# EAGLE board SparkFun_Clock_Generator_5PV49V60-Panel (EAGLE 9.5.1), part 1 of 6
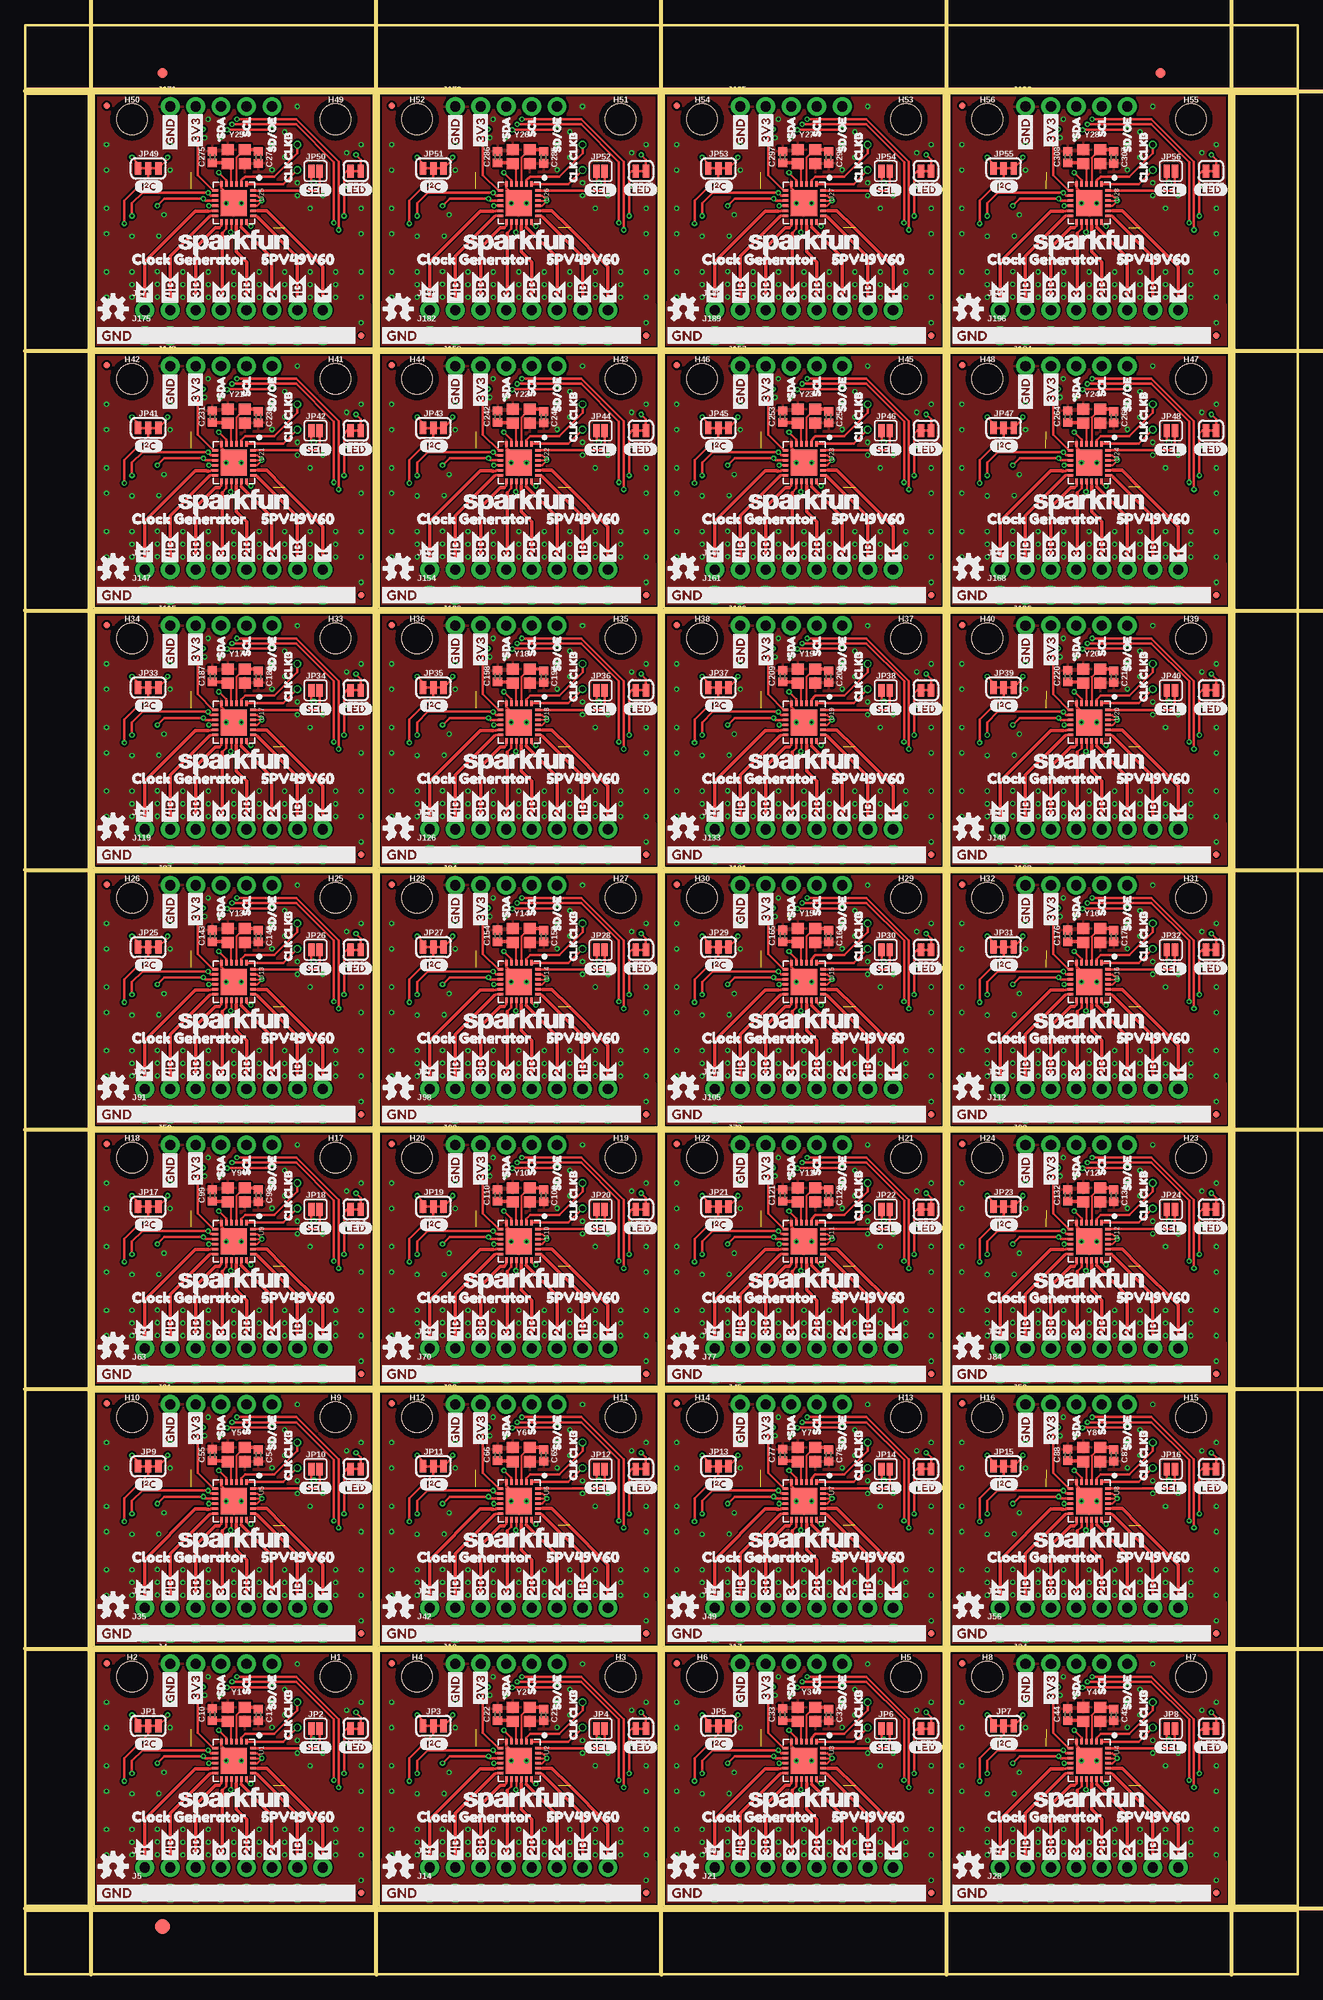
[diagram p0: board, top side]
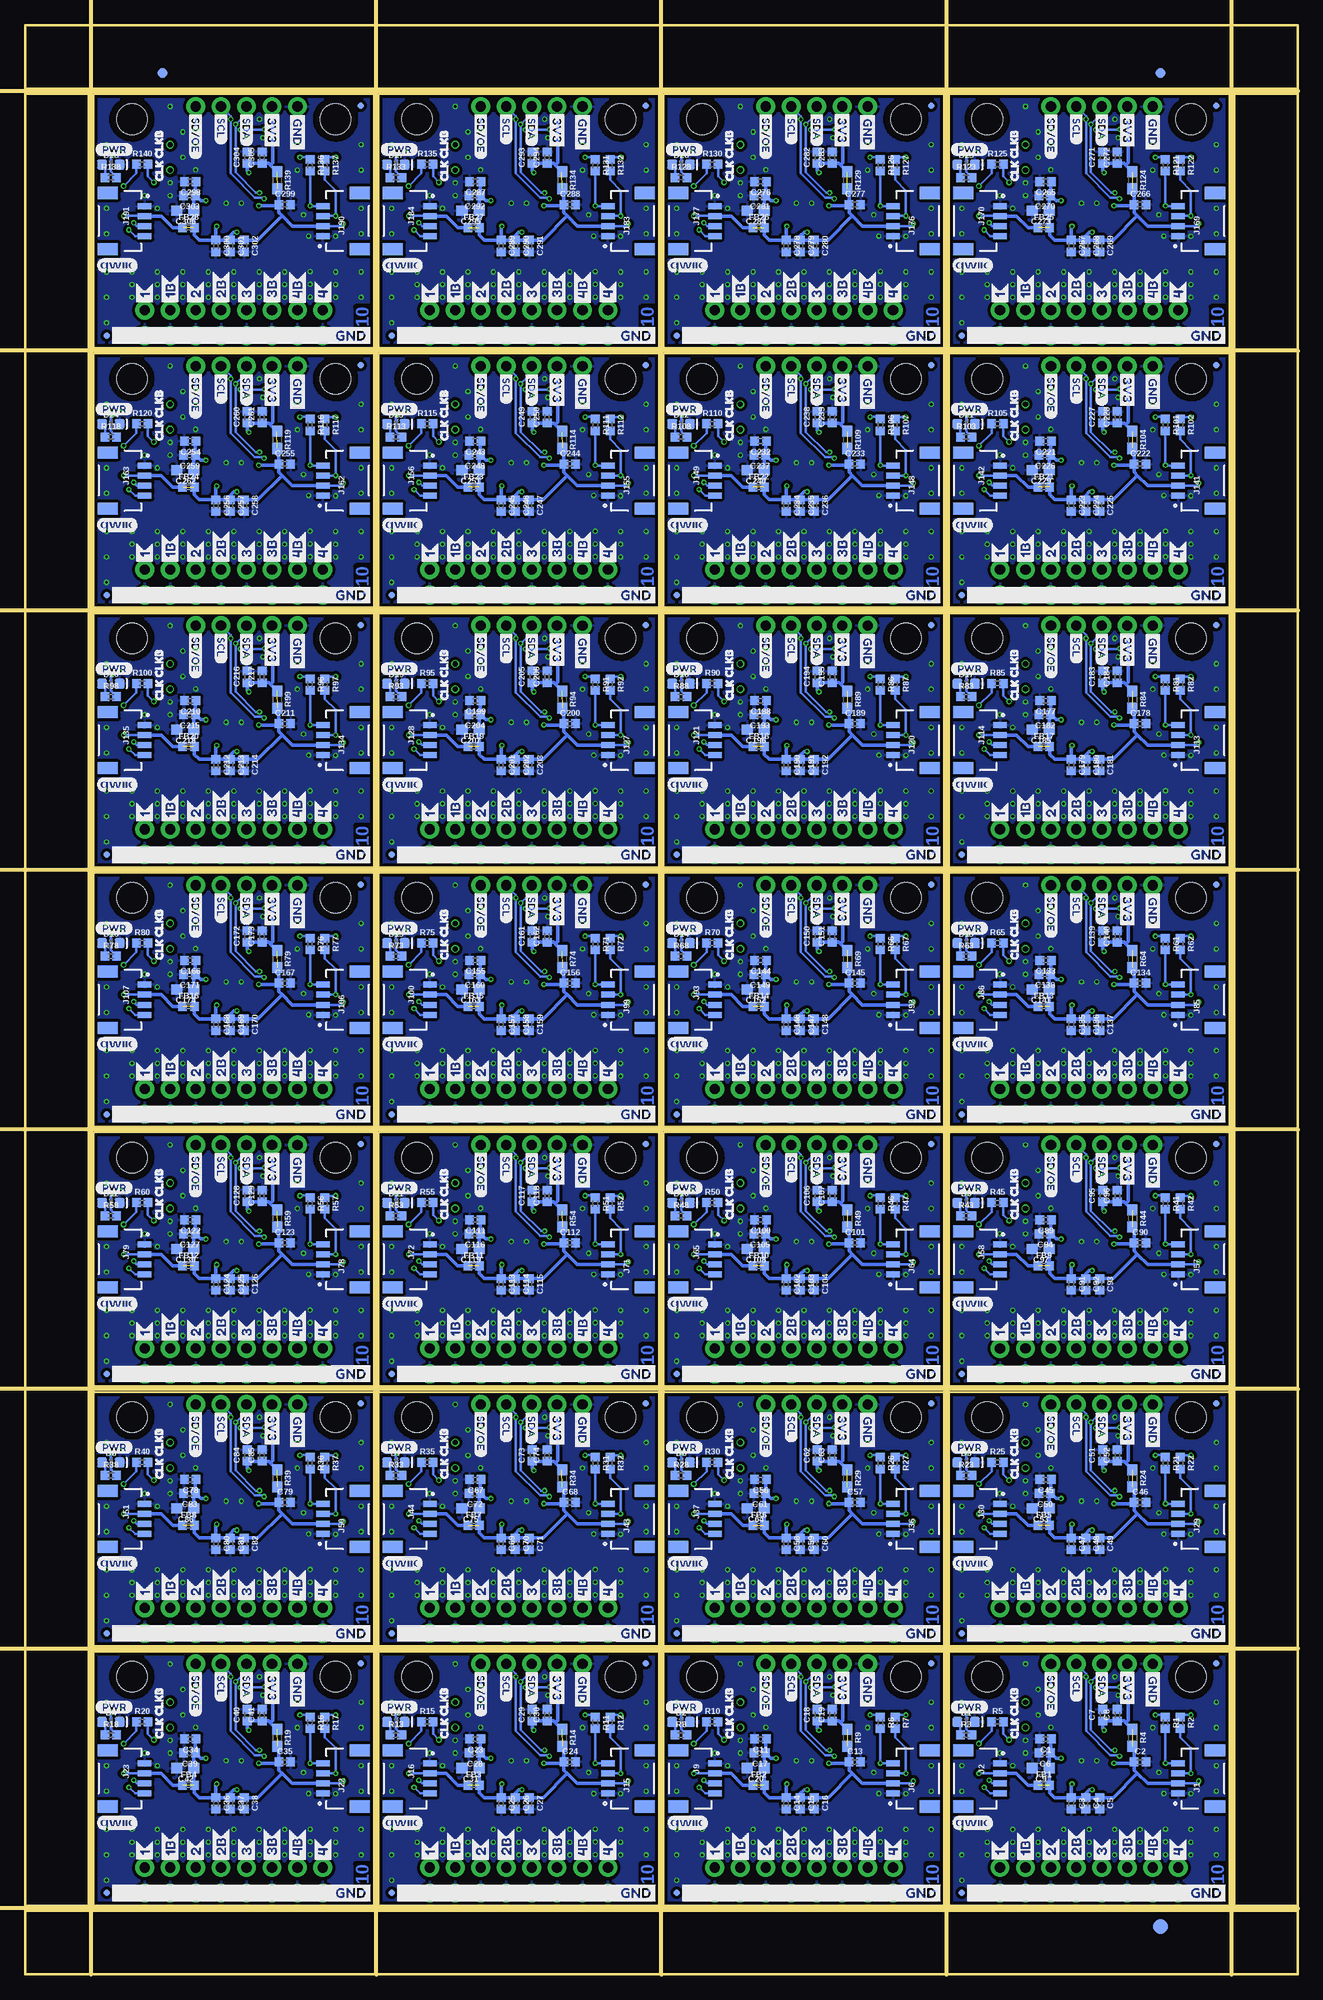
[diagram p1: board, bottom side, seen from below]

Size 127 x 194.56 mm. Coordinates in mm from the lower left corner, seen from the top.
Outline: 128 segments
Copper layers (1*16): Top 0.035mm / dielectric 1.5mm / Bottom 0.035mm
Design rules "SparkFun-2-layer-FAB-LIMIT": minimum track width 4mil, minimum drill 6mil, track to track 4mil, track to pad 4mil, pad to pad 4mil, via to via 4mil, smd to smd 4mil, copper to edge 4mil, drill to drill 4mil, minimum pad ring 5mil, minimum via ring 5mil, stop-mask expansion 4mil, vias tented up to drill 25mil, thermal gap 10mil
Net classes: 1 Clock: clearance 0.127 mm
tRestrict: area 22.2,21.2 to 22.4,22.2; area 20.5,22.7 to 21.4,22.8; area 19.3,21.3 to 19.5,22.2; area 50.7,21.2 to 50.8,22.2; area 48.9,22.7 to 49.9,22.8; area 47.8,21.3 to 47.9,22.2; area 79.1,21.2 to 79.2,22.2; area 77.4,22.7 to 78.3,22.8; area 76.2,21.3 to 76.4,22.2; area 107.6,21.2 to 107.7,22.2; area 105.8,22.7 to 106.8,22.8; area 104.7,21.3 to 104.8,22.2; 72 more areas
Milling: 13 lines

## Footprints (pad centres in the part's own frame; a part is rotated, then mirrored left to right if it is on the bottom)
0402 = smd 0.85 x 0.9: 1 -0.58,0; 2 0.58,0
0603 = smd 1.1 x 1: 1 -0.85,0; 2 0.85,0
LED-0603 = smd 1 x 1: A -0.877,0; C 0.877,0
FIDUCIAL-1X2 = smd 1 x 1: 1 0,0
FIDUCIAL-1.5X3 = smd 1.5 x 1.5: 1 0,0
FIDUCIAL-MICRO = smd 0.635 x 0.635: 1 0,0
STAND-OFF-TIGHT = hole 3.048: 0,0
JST04_1MM_RA = smd 0.6 x 1.35: 1 -1.5,0; 2 -0.5,0; 3 0.5,0; 4 1.5,0 | smd 1.2 x 2: NC1 2.8,-3.675; NC2 -2.8,-3.675
1X08_NO_SILK = drill 1.016 pad 1.88: 1 0,0; 2 2.54,0; 3 5.08,0; 4 7.62,0; 5 10.16,0; 6 12.7,0; 7 15.24,0; 8 17.78,0
1X05_NO_SILK = drill 1.016 pad 1.88: 1 0,0; 2 2.54,0; 3 5.08,0; 4 7.62,0; 5 10.16,0
1X01_SMALL = drill 0.508: P$1 0,0
SMT-JUMPER_3_2-NC_TRACE_SILK = smd 0.635 x 1.27: 1 -1.016,0; 2 0,0; 3 1.016,0
SMT-JUMPER_2_NO_SILK = smd 0.635 x 1.27: 1 -0.406,0; 2 0.406,0
SMT-JUMPER_2_NC_TRACE_SILK = smd 0.635 x 1.27: 1 -0.508,0; 2 0.508,0
VFQFPN-24 = smd 2.6 x 2.6: GND 0,0 | smd 0.55 x 0.25: P1 -1.9,1.25; P2 -1.9,0.75; P3 -1.9,0.25; P4 -1.9,-0.25; P5 -1.9,-0.75; P6 -1.9,-1.25; P13 1.85,-1.25; P14 1.85,-0.75; P15 1.85,-0.25; P16 1.85,0.25; P17 1.85,0.75; P18 1.85,1.25 | smd 0.25 x 0.55: P7 -1.25,-1.85; P8 -0.75,-1.85; P9 -0.25,-1.85; P10 0.25,-1.85; P11 0.75,-1.85; P12 1.25,-1.85; P19 1.25,1.9; P20 0.75,1.9; P21 0.25,1.9; P22 -0.25,1.9; P23 -0.75,1.9; P24 -1.25,1.9
CRYSTAL-SMD-2X2.5MM = smd 1.2 x 1.1: P1 0.846,0.69; P2 -0.854,0.69; P3 -0.854,-0.71; P4 0.846,-0.71

## Placement (x,y rotation side)
C1  0.1uF  [0402]  25.17,23.5 180 bottom
C2  0.1uF  [0402]  15.75,21.21 0 bottom
C3  0.1uF  [0402]  22.61,17.07 270 bottom
C4  0.1uF  [0402]  21.18,17.07 270 bottom
C5  0.1uF  [0402]  19.79,17.07 270 bottom
C6  0.1uF  [0402]  25.25,22.1 180 bottom
C7  0.1uF  [0402]  19.48,25.88 90 bottom
C8  1.0uF  [0402]  18.01,25.88 90 bottom
C9  10uF  [0603]  25.65,20.6 180 bottom
C10  12pF  [0402]  18.69,25.94 90 top
C11  0.1uF  [0402]  53.62,23.5 180 bottom
C12  12pF  [0402]  23.29,25.9 270 top
C13  0.1uF  [0402]  44.2,21.21 0 bottom
C14  0.1uF  [0402]  51.05,17.07 270 bottom
C15  0.1uF  [0402]  49.63,17.07 270 bottom
C16  0.1uF  [0402]  48.23,17.07 270 bottom
C17  0.1uF  [0402]  53.7,22.1 180 bottom
C18  0.1uF  [0402]  47.93,25.88 90 bottom
C19  1.0uF  [0402]  46.46,25.88 90 bottom
C20  10uF  [0603]  54.1,20.6 180 bottom
C21  12pF  [0402]  51.74,25.9 270 top
C22  12pF  [0402]  47.14,25.94 90 top
C23  0.1uF  [0402]  82.07,23.5 180 bottom
C24  0.1uF  [0402]  72.64,21.21 0 bottom
C25  0.1uF  [0402]  79.5,17.07 270 bottom
C26  0.1uF  [0402]  78.08,17.07 270 bottom
C27  0.1uF  [0402]  76.68,17.07 270 bottom
C28  0.1uF  [0402]  82.14,22.1 180 bottom
C29  0.1uF  [0402]  76.38,25.88 90 bottom
C30  1.0uF  [0402]  74.9,25.88 90 bottom
C31  10uF  [0603]  82.55,20.6 180 bottom
C32  12pF  [0402]  80.19,25.9 270 top
C33  12pF  [0402]  75.59,25.94 90 top
C34  0.1uF  [0402]  110.52,23.5 180 bottom
C35  0.1uF  [0402]  101.09,21.21 0 bottom
C36  0.1uF  [0402]  107.95,17.07 270 bottom
C37  0.1uF  [0402]  106.53,17.07 270 bottom
C38  0.1uF  [0402]  105.13,17.07 270 bottom
C39  0.1uF  [0402]  110.59,22.1 180 bottom
C40  0.1uF  [0402]  104.83,25.88 90 bottom
C41  1.0uF  [0402]  103.35,25.88 90 bottom
C42  10uF  [0603]  111,20.6 180 bottom
C43  12pF  [0402]  108.64,25.9 270 top
C44  12pF  [0402]  104.04,25.94 90 top
C45  0.1uF  [0402]  25.17,49.4 180 bottom
C46  0.1uF  [0402]  15.75,47.12 0 bottom
C47  0.1uF  [0402]  22.61,42.98 270 bottom
C48  0.1uF  [0402]  21.18,42.98 270 bottom
C49  0.1uF  [0402]  19.79,42.98 270 bottom
C50  0.1uF  [0402]  25.25,48.01 180 bottom
C51  0.1uF  [0402]  19.48,51.79 90 bottom
C52  1.0uF  [0402]  18.01,51.79 90 bottom
C53  10uF  [0603]  25.65,46.51 180 bottom
C54  12pF  [0402]  23.29,51.81 270 top
C55  12pF  [0402]  18.69,51.85 90 top
C56  0.1uF  [0402]  53.62,49.4 180 bottom
C57  0.1uF  [0402]  44.2,47.12 0 bottom
C58  0.1uF  [0402]  51.05,42.98 270 bottom
C59  0.1uF  [0402]  49.63,42.98 270 bottom
C60  0.1uF  [0402]  48.23,42.98 270 bottom
C61  0.1uF  [0402]  53.7,48.01 180 bottom
C62  0.1uF  [0402]  47.93,51.79 90 bottom
C63  1.0uF  [0402]  46.46,51.79 90 bottom
C64  10uF  [0603]  54.1,46.51 180 bottom
C65  12pF  [0402]  51.74,51.81 270 top
C66  12pF  [0402]  47.14,51.85 90 top
C67  0.1uF  [0402]  82.07,49.4 180 bottom
C68  0.1uF  [0402]  72.64,47.12 0 bottom
C69  0.1uF  [0402]  79.5,42.98 270 bottom
C70  0.1uF  [0402]  78.08,42.98 270 bottom
C71  0.1uF  [0402]  76.68,42.98 270 bottom
C72  0.1uF  [0402]  82.14,48.01 180 bottom
C73  0.1uF  [0402]  76.38,51.79 90 bottom
C74  1.0uF  [0402]  74.9,51.79 90 bottom
C75  10uF  [0603]  82.55,46.51 180 bottom
C76  12pF  [0402]  80.19,51.81 270 top
C77  12pF  [0402]  75.59,51.85 90 top
C78  0.1uF  [0402]  110.52,49.4 180 bottom
C79  0.1uF  [0402]  101.09,47.12 0 bottom
C80  0.1uF  [0402]  107.95,42.98 270 bottom
C81  0.1uF  [0402]  106.53,42.98 270 bottom
C82  0.1uF  [0402]  105.13,42.98 270 bottom
C83  0.1uF  [0402]  110.59,48.01 180 bottom
C84  0.1uF  [0402]  104.83,51.79 90 bottom
C85  1.0uF  [0402]  103.35,51.79 90 bottom
C86  10uF  [0603]  111,46.51 180 bottom
C87  12pF  [0402]  108.64,51.81 270 top
C88  12pF  [0402]  104.04,51.85 90 top
C89  0.1uF  [0402]  25.17,75.31 180 bottom
C90  0.1uF  [0402]  15.75,73.03 0 bottom
C91  0.1uF  [0402]  22.61,68.88 270 bottom
C92  0.1uF  [0402]  21.18,68.88 270 bottom
C93  0.1uF  [0402]  19.79,68.88 270 bottom
C94  0.1uF  [0402]  25.25,73.91 180 bottom
C95  0.1uF  [0402]  19.48,77.7 90 bottom
C96  1.0uF  [0402]  18.01,77.7 90 bottom
C97  10uF  [0603]  25.65,72.42 180 bottom
C98  12pF  [0402]  23.29,77.72 270 top
C99  12pF  [0402]  18.69,77.75 90 top
C100  0.1uF  [0402]  53.62,75.31 180 bottom
C101  0.1uF  [0402]  44.2,73.03 0 bottom
C102  0.1uF  [0402]  51.05,68.88 270 bottom
C103  0.1uF  [0402]  49.63,68.88 270 bottom
C104  0.1uF  [0402]  48.23,68.88 270 bottom
C105  0.1uF  [0402]  53.7,73.91 180 bottom
C106  0.1uF  [0402]  47.93,77.7 90 bottom
C107  1.0uF  [0402]  46.46,77.7 90 bottom
C108  10uF  [0603]  54.1,72.42 180 bottom
C109  12pF  [0402]  51.74,77.72 270 top
C110  12pF  [0402]  47.14,77.75 90 top
C111  0.1uF  [0402]  82.07,75.31 180 bottom
C112  0.1uF  [0402]  72.64,73.03 0 bottom
C113  0.1uF  [0402]  79.5,68.88 270 bottom
C114  0.1uF  [0402]  78.08,68.88 270 bottom
C115  0.1uF  [0402]  76.68,68.88 270 bottom
C116  0.1uF  [0402]  82.14,73.91 180 bottom
C117  0.1uF  [0402]  76.38,77.7 90 bottom
C118  1.0uF  [0402]  74.9,77.7 90 bottom
C119  10uF  [0603]  82.55,72.42 180 bottom
C120  12pF  [0402]  80.19,77.72 270 top
C121  12pF  [0402]  75.59,77.75 90 top
C122  0.1uF  [0402]  110.52,75.31 180 bottom
C123  0.1uF  [0402]  101.09,73.03 0 bottom
C124  0.1uF  [0402]  107.95,68.88 270 bottom
C125  0.1uF  [0402]  106.53,68.88 270 bottom
C126  0.1uF  [0402]  105.13,68.88 270 bottom
C127  0.1uF  [0402]  110.59,73.91 180 bottom
C128  0.1uF  [0402]  104.83,77.7 90 bottom
C129  1.0uF  [0402]  103.35,77.7 90 bottom
C130  10uF  [0603]  111,72.42 180 bottom
C131  12pF  [0402]  108.64,77.72 270 top
C132  12pF  [0402]  104.04,77.75 90 top
C133  0.1uF  [0402]  25.17,101.22 180 bottom
C134  0.1uF  [0402]  15.75,98.93 0 bottom
C135  0.1uF  [0402]  22.61,94.79 270 bottom
C136  0.1uF  [0402]  21.18,94.79 270 bottom
C137  0.1uF  [0402]  19.79,94.79 270 bottom
C138  0.1uF  [0402]  25.25,99.82 180 bottom
C139  0.1uF  [0402]  19.48,103.61 90 bottom
C140  1.0uF  [0402]  18.01,103.61 90 bottom
C141  10uF  [0603]  25.65,98.32 180 bottom
C142  12pF  [0402]  23.29,103.63 270 top
C143  12pF  [0402]  18.69,103.66 90 top
C144  0.1uF  [0402]  53.62,101.22 180 bottom
C145  0.1uF  [0402]  44.2,98.93 0 bottom
C146  0.1uF  [0402]  51.05,94.79 270 bottom
C147  0.1uF  [0402]  49.63,94.79 270 bottom
C148  0.1uF  [0402]  48.23,94.79 270 bottom
C149  0.1uF  [0402]  53.7,99.82 180 bottom
C150  0.1uF  [0402]  47.93,103.61 90 bottom
C151  1.0uF  [0402]  46.46,103.61 90 bottom
C152  10uF  [0603]  54.1,98.32 180 bottom
C153  12pF  [0402]  51.74,103.63 270 top
C154  12pF  [0402]  47.14,103.66 90 top
C155  0.1uF  [0402]  82.07,101.22 180 bottom
C156  0.1uF  [0402]  72.64,98.93 0 bottom
C157  0.1uF  [0402]  79.5,94.79 270 bottom
C158  0.1uF  [0402]  78.08,94.79 270 bottom
C159  0.1uF  [0402]  76.68,94.79 270 bottom
C160  0.1uF  [0402]  82.14,99.82 180 bottom
C161  0.1uF  [0402]  76.38,103.61 90 bottom
C162  1.0uF  [0402]  74.9,103.61 90 bottom
C163  10uF  [0603]  82.55,98.32 180 bottom
C164  12pF  [0402]  80.19,103.63 270 top
C165  12pF  [0402]  75.59,103.66 90 top
C166  0.1uF  [0402]  110.52,101.22 180 bottom
C167  0.1uF  [0402]  101.09,98.93 0 bottom
C168  0.1uF  [0402]  107.95,94.79 270 bottom
C169  0.1uF  [0402]  106.53,94.79 270 bottom
C170  0.1uF  [0402]  105.13,94.79 270 bottom
C171  0.1uF  [0402]  110.59,99.82 180 bottom
C172  0.1uF  [0402]  104.83,103.61 90 bottom
C173  1.0uF  [0402]  103.35,103.61 90 bottom
C174  10uF  [0603]  111,98.32 180 bottom
C175  12pF  [0402]  108.64,103.63 270 top
C176  12pF  [0402]  104.04,103.66 90 top
C177  0.1uF  [0402]  25.17,127.13 180 bottom
C178  0.1uF  [0402]  15.75,124.84 0 bottom
C179  0.1uF  [0402]  22.61,120.7 270 bottom
C180  0.1uF  [0402]  21.18,120.7 270 bottom
C181  0.1uF  [0402]  19.79,120.7 270 bottom
C182  0.1uF  [0402]  25.25,125.73 180 bottom
C183  0.1uF  [0402]  19.48,129.51 90 bottom
C184  1.0uF  [0402]  18.01,129.51 90 bottom
C185  10uF  [0603]  25.65,124.23 180 bottom
C186  12pF  [0402]  23.29,129.54 270 top
C187  12pF  [0402]  18.69,129.57 90 top
C188  0.1uF  [0402]  53.62,127.13 180 bottom
C189  0.1uF  [0402]  44.2,124.84 0 bottom
C190  0.1uF  [0402]  51.05,120.7 270 bottom
C191  0.1uF  [0402]  49.63,120.7 270 bottom
C192  0.1uF  [0402]  48.23,120.7 270 bottom
C193  0.1uF  [0402]  53.7,125.73 180 bottom
C194  0.1uF  [0402]  47.93,129.51 90 bottom
C195  1.0uF  [0402]  46.46,129.51 90 bottom
C196  10uF  [0603]  54.1,124.23 180 bottom
C197  12pF  [0402]  51.74,129.54 270 top
C198  12pF  [0402]  47.14,129.57 90 top
C199  0.1uF  [0402]  82.07,127.13 180 bottom
C200  0.1uF  [0402]  72.64,124.84 0 bottom
C201  0.1uF  [0402]  79.5,120.7 270 bottom
C202  0.1uF  [0402]  78.08,120.7 270 bottom
C203  0.1uF  [0402]  76.68,120.7 270 bottom
C204  0.1uF  [0402]  82.14,125.73 180 bottom
C205  0.1uF  [0402]  76.38,129.51 90 bottom
C206  1.0uF  [0402]  74.9,129.51 90 bottom
C207  10uF  [0603]  82.55,124.23 180 bottom
C208  12pF  [0402]  80.19,129.54 270 top
C209  12pF  [0402]  75.59,129.57 90 top
C210  0.1uF  [0402]  110.52,127.13 180 bottom
C211  0.1uF  [0402]  101.09,124.84 0 bottom
C212  0.1uF  [0402]  107.95,120.7 270 bottom
C213  0.1uF  [0402]  106.53,120.7 270 bottom
C214  0.1uF  [0402]  105.13,120.7 270 bottom
C215  0.1uF  [0402]  110.59,125.73 180 bottom
C216  0.1uF  [0402]  104.83,129.51 90 bottom
C217  1.0uF  [0402]  103.35,129.51 90 bottom
C218  10uF  [0603]  111,124.23 180 bottom
C219  12pF  [0402]  108.64,129.54 270 top
C220  12pF  [0402]  104.04,129.57 90 top
C221  0.1uF  [0402]  25.17,153.03 180 bottom
C222  0.1uF  [0402]  15.75,150.75 0 bottom
C223  0.1uF  [0402]  22.61,146.61 270 bottom
C224  0.1uF  [0402]  21.18,146.61 270 bottom
C225  0.1uF  [0402]  19.79,146.61 270 bottom
C226  0.1uF  [0402]  25.25,151.64 180 bottom
C227  0.1uF  [0402]  19.48,155.42 90 bottom
C228  1.0uF  [0402]  18.01,155.42 90 bottom
C229  10uF  [0603]  25.65,150.14 180 bottom
C230  12pF  [0402]  23.29,155.44 270 top
C231  12pF  [0402]  18.69,155.48 90 top
C232  0.1uF  [0402]  53.62,153.03 180 bottom
C233  0.1uF  [0402]  44.2,150.75 0 bottom
C234  0.1uF  [0402]  51.05,146.61 270 bottom
C235  0.1uF  [0402]  49.63,146.61 270 bottom
C236  0.1uF  [0402]  48.23,146.61 270 bottom
C237  0.1uF  [0402]  53.7,151.64 180 bottom
C238  0.1uF  [0402]  47.93,155.42 90 bottom
C239  1.0uF  [0402]  46.46,155.42 90 bottom
C240  10uF  [0603]  54.1,150.14 180 bottom
C241  12pF  [0402]  51.74,155.44 270 top
C242  12pF  [0402]  47.14,155.48 90 top
C243  0.1uF  [0402]  82.07,153.03 180 bottom
C244  0.1uF  [0402]  72.64,150.75 0 bottom
C245  0.1uF  [0402]  79.5,146.61 270 bottom
C246  0.1uF  [0402]  78.08,146.61 270 bottom
C247  0.1uF  [0402]  76.68,146.61 270 bottom
C248  0.1uF  [0402]  82.14,151.64 180 bottom
C249  0.1uF  [0402]  76.38,155.42 90 bottom
C250  1.0uF  [0402]  74.9,155.42 90 bottom
C251  10uF  [0603]  82.55,150.14 180 bottom
C252  12pF  [0402]  80.19,155.44 270 top
C253  12pF  [0402]  75.59,155.48 90 top
C254  0.1uF  [0402]  110.52,153.03 180 bottom
C255  0.1uF  [0402]  101.09,150.75 0 bottom
C256  0.1uF  [0402]  107.95,146.61 270 bottom
C257  0.1uF  [0402]  106.53,146.61 270 bottom
C258  0.1uF  [0402]  105.13,146.61 270 bottom
C259  0.1uF  [0402]  110.59,151.64 180 bottom
C260  0.1uF  [0402]  104.83,155.42 90 bottom
C261  1.0uF  [0402]  103.35,155.42 90 bottom
C262  10uF  [0603]  111,150.14 180 bottom
C263  12pF  [0402]  108.64,155.44 270 top
C264  12pF  [0402]  104.04,155.48 90 top
C265  0.1uF  [0402]  25.17,178.94 180 bottom
C266  0.1uF  [0402]  15.75,176.66 0 bottom
C267  0.1uF  [0402]  22.61,172.52 270 bottom
C268  0.1uF  [0402]  21.18,172.52 270 bottom
C269  0.1uF  [0402]  19.79,172.52 270 bottom
C270  0.1uF  [0402]  25.25,177.55 180 bottom
C271  0.1uF  [0402]  19.48,181.33 90 bottom
C272  1.0uF  [0402]  18.01,181.33 90 bottom
C273  10uF  [0603]  25.65,176.05 180 bottom
C274  12pF  [0402]  23.29,181.35 270 top
C275  12pF  [0402]  18.69,181.39 90 top
C276  0.1uF  [0402]  53.62,178.94 180 bottom
C277  0.1uF  [0402]  44.2,176.66 0 bottom
C278  0.1uF  [0402]  51.05,172.52 270 bottom
C279  0.1uF  [0402]  49.63,172.52 270 bottom
C280  0.1uF  [0402]  48.23,172.52 270 bottom
C281  0.1uF  [0402]  53.7,177.55 180 bottom
C282  0.1uF  [0402]  47.93,181.33 90 bottom
C283  1.0uF  [0402]  46.46,181.33 90 bottom
C284  10uF  [0603]  54.1,176.05 180 bottom
C285  12pF  [0402]  51.74,181.35 270 top
C286  12pF  [0402]  47.14,181.39 90 top
C287  0.1uF  [0402]  82.07,178.94 180 bottom
C288  0.1uF  [0402]  72.64,176.66 0 bottom
C289  0.1uF  [0402]  79.5,172.52 270 bottom
C290  0.1uF  [0402]  78.08,172.52 270 bottom
C291  0.1uF  [0402]  76.68,172.52 270 bottom
C292  0.1uF  [0402]  82.14,177.55 180 bottom
C293  0.1uF  [0402]  76.38,181.33 90 bottom
C294  1.0uF  [0402]  74.9,181.33 90 bottom
C295  10uF  [0603]  82.55,176.05 180 bottom
C296  12pF  [0402]  80.19,181.35 270 top
C297  12pF  [0402]  75.59,181.39 90 top
C298  0.1uF  [0402]  110.52,178.94 180 bottom
C299  0.1uF  [0402]  101.09,176.66 0 bottom
C300  0.1uF  [0402]  107.95,172.52 270 bottom
C301  0.1uF  [0402]  106.53,172.52 270 bottom
C302  0.1uF  [0402]  105.13,172.52 270 bottom
C303  0.1uF  [0402]  110.59,177.55 180 bottom
C304  0.1uF  [0402]  104.83,181.33 90 bottom
C305  1.0uF  [0402]  103.35,181.33 90 bottom
C306  10uF  [0603]  111,176.05 180 bottom
C307  12pF  [0402]  108.64,181.35 270 top
C308  12pF  [0402]  104.04,181.39 90 top
D1  RED  [LED-0603]  33.1,25.2 0 bottom
D2  RED  [LED-0603]  61.54,25.2 0 bottom
D3  RED  [LED-0603]  89.99,25.2 0 bottom
D4  RED  [LED-0603]  118.44,25.2 0 bottom
D5  RED  [LED-0603]  33.1,51.1 0 bottom
D6  RED  [LED-0603]  61.54,51.1 0 bottom
D7  RED  [LED-0603]  89.99,51.1 0 bottom
D8  RED  [LED-0603]  118.44,51.1 0 bottom
D9  RED  [LED-0603]  33.1,77.01 0 bottom
D10  RED  [LED-0603]  61.54,77.01 0 bottom
D11  RED  [LED-0603]  89.99,77.01 0 bottom
D12  RED  [LED-0603]  118.44,77.01 0 bottom
D13  RED  [LED-0603]  33.1,102.92 0 bottom
D14  RED  [LED-0603]  61.54,102.92 0 bottom
D15  RED  [LED-0603]  89.99,102.92 0 bottom
D16  RED  [LED-0603]  118.44,102.92 0 bottom
D17  RED  [LED-0603]  33.1,128.83 0 bottom
D18  RED  [LED-0603]  61.54,128.83 0 bottom
D19  RED  [LED-0603]  89.99,128.83 0 bottom
D20  RED  [LED-0603]  118.44,128.83 0 bottom
D21  RED  [LED-0603]  33.1,154.74 0 bottom
D22  RED  [LED-0603]  61.54,154.74 0 bottom
D23  RED  [LED-0603]  89.99,154.74 0 bottom
D24  RED  [LED-0603]  118.44,154.74 0 bottom
D25  RED  [LED-0603]  33.1,180.64 0 bottom
D26  RED  [LED-0603]  61.54,180.64 0 bottom
D27  RED  [LED-0603]  89.99,180.64 0 bottom
D28  RED  [LED-0603]  118.44,180.64 0 bottom
E$1  [FIDUCIAL-1X2]  13.72,189.8 0 top
E$2  [FIDUCIAL-1X2]  13.72,189.8 0 bottom
E$3  [FIDUCIAL-1X2]  113.28,189.8 0 top
E$4  [FIDUCIAL-1X2]  113.28,189.8 0 bottom
E$5  [FIDUCIAL-1.5X3]  13.72,4.76 0 top
E$6  [FIDUCIAL-1.5X3]  13.72,4.76 0 bottom
FB1  FERRITE_BEAD-120_OHM-0402  [0402]  25.35,18.9 0 bottom
FB2  FERRITE_BEAD-120_OHM-0402  [0402]  53.8,18.9 0 bottom
FB3  FERRITE_BEAD-120_OHM-0402  [0402]  82.25,18.9 0 bottom
FB4  FERRITE_BEAD-120_OHM-0402  [0402]  110.69,18.9 0 bottom
FB5  FERRITE_BEAD-120_OHM-0402  [0402]  25.35,44.81 0 bottom
FB6  FERRITE_BEAD-120_OHM-0402  [0402]  53.8,44.81 0 bottom
FB7  FERRITE_BEAD-120_OHM-0402  [0402]  82.25,44.81 0 bottom
FB8  FERRITE_BEAD-120_OHM-0402  [0402]  110.69,44.81 0 bottom
FB9  FERRITE_BEAD-120_OHM-0402  [0402]  25.35,70.71 0 bottom
FB10  FERRITE_BEAD-120_OHM-0402  [0402]  53.8,70.71 0 bottom
FB11  FERRITE_BEAD-120_OHM-0402  [0402]  82.25,70.71 0 bottom
FB12  FERRITE_BEAD-120_OHM-0402  [0402]  110.69,70.71 0 bottom
FB13  FERRITE_BEAD-120_OHM-0402  [0402]  25.35,96.62 0 bottom
FB14  FERRITE_BEAD-120_OHM-0402  [0402]  53.8,96.62 0 bottom
FB15  FERRITE_BEAD-120_OHM-0402  [0402]  82.25,96.62 0 bottom
FB16  FERRITE_BEAD-120_OHM-0402  [0402]  110.69,96.62 0 bottom
FB17  FERRITE_BEAD-120_OHM-0402  [0402]  25.35,122.53 0 bottom
FB18  FERRITE_BEAD-120_OHM-0402  [0402]  53.8,122.53 0 bottom
FB19  FERRITE_BEAD-120_OHM-0402  [0402]  82.25,122.53 0 bottom
FB20  FERRITE_BEAD-120_OHM-0402  [0402]  110.69,122.53 0 bottom
FB21  FERRITE_BEAD-120_OHM-0402  [0402]  25.35,148.44 0 bottom
FB22  FERRITE_BEAD-120_OHM-0402  [0402]  53.8,148.44 0 bottom
FB23  FERRITE_BEAD-120_OHM-0402  [0402]  82.25,148.44 0 bottom
FB24  FERRITE_BEAD-120_OHM-0402  [0402]  110.69,148.44 0 bottom
FB25  FERRITE_BEAD-120_OHM-0402  [0402]  25.35,174.35 0 bottom
FB26  FERRITE_BEAD-120_OHM-0402  [0402]  53.8,174.35 0 bottom
FB27  FERRITE_BEAD-120_OHM-0402  [0402]  82.25,174.35 0 bottom
FB28  FERRITE_BEAD-120_OHM-0402  [0402]  110.69,174.35 0 bottom
FD1  FIDUCIALUFIDUCIAL  [FIDUCIAL-MICRO]  8.15,31.06 0 top
FD2  FIDUCIALUFIDUCIAL  [FIDUCIAL-MICRO]  8.15,31.06 0 bottom
FD3  FIDUCIALUFIDUCIAL  [FIDUCIAL-MICRO]  33.53,8.13 0 bottom
FD4  FIDUCIALUFIDUCIAL  [FIDUCIAL-MICRO]  33.53,8.13 0 top
FD5  FIDUCIALUFIDUCIAL  [FIDUCIAL-MICRO]  36.6,31.06 0 top
FD6  FIDUCIALUFIDUCIAL  [FIDUCIAL-MICRO]  36.6,31.06 0 bottom
FD7  FIDUCIALUFIDUCIAL  [FIDUCIAL-MICRO]  61.98,8.13 0 bottom
FD8  FIDUCIALUFIDUCIAL  [FIDUCIAL-MICRO]  61.98,8.13 0 top
FD9  FIDUCIALUFIDUCIAL  [FIDUCIAL-MICRO]  65.05,31.06 0 top
FD10  FIDUCIALUFIDUCIAL  [FIDUCIAL-MICRO]  65.05,31.06 0 bottom
FD11  FIDUCIALUFIDUCIAL  [FIDUCIAL-MICRO]  90.42,8.13 0 bottom
FD12  FIDUCIALUFIDUCIAL  [FIDUCIAL-MICRO]  90.42,8.13 0 top
FD13  FIDUCIALUFIDUCIAL  [FIDUCIAL-MICRO]  93.5,31.06 0 top
FD14  FIDUCIALUFIDUCIAL  [FIDUCIAL-MICRO]  93.5,31.06 0 bottom
FD15  FIDUCIALUFIDUCIAL  [FIDUCIAL-MICRO]  118.87,8.13 0 bottom
FD16  FIDUCIALUFIDUCIAL  [FIDUCIAL-MICRO]  118.87,8.13 0 top
FD17  FIDUCIALUFIDUCIAL  [FIDUCIAL-MICRO]  8.15,56.97 0 top
FD18  FIDUCIALUFIDUCIAL  [FIDUCIAL-MICRO]  8.15,56.97 0 bottom
FD19  FIDUCIALUFIDUCIAL  [FIDUCIAL-MICRO]  33.53,34.04 0 bottom
FD20  FIDUCIALUFIDUCIAL  [FIDUCIAL-MICRO]  33.53,34.04 0 top
FD21  FIDUCIALUFIDUCIAL  [FIDUCIAL-MICRO]  36.6,56.97 0 top
FD22  FIDUCIALUFIDUCIAL  [FIDUCIAL-MICRO]  36.6,56.97 0 bottom
FD23  FIDUCIALUFIDUCIAL  [FIDUCIAL-MICRO]  61.98,34.04 0 bottom
FD24  FIDUCIALUFIDUCIAL  [FIDUCIAL-MICRO]  61.98,34.04 0 top
FD25  FIDUCIALUFIDUCIAL  [FIDUCIAL-MICRO]  65.05,56.97 0 top
FD26  FIDUCIALUFIDUCIAL  [FIDUCIAL-MICRO]  65.05,56.97 0 bottom
FD27  FIDUCIALUFIDUCIAL  [FIDUCIAL-MICRO]  90.42,34.04 0 bottom
FD28  FIDUCIALUFIDUCIAL  [FIDUCIAL-MICRO]  90.42,34.04 0 top
FD29  FIDUCIALUFIDUCIAL  [FIDUCIAL-MICRO]  93.5,56.97 0 top
FD30  FIDUCIALUFIDUCIAL  [FIDUCIAL-MICRO]  93.5,56.97 0 bottom
FD31  FIDUCIALUFIDUCIAL  [FIDUCIAL-MICRO]  118.87,34.04 0 bottom
FD32  FIDUCIALUFIDUCIAL  [FIDUCIAL-MICRO]  118.87,34.04 0 top
FD33  FIDUCIALUFIDUCIAL  [FIDUCIAL-MICRO]  8.15,82.88 0 top
FD34  FIDUCIALUFIDUCIAL  [FIDUCIAL-MICRO]  8.15,82.88 0 bottom
FD35  FIDUCIALUFIDUCIAL  [FIDUCIAL-MICRO]  33.53,59.94 0 bottom
FD36  FIDUCIALUFIDUCIAL  [FIDUCIAL-MICRO]  33.53,59.94 0 top
FD37  FIDUCIALUFIDUCIAL  [FIDUCIAL-MICRO]  36.6,82.88 0 top
FD38  FIDUCIALUFIDUCIAL  [FIDUCIAL-MICRO]  36.6,82.88 0 bottom
FD39  FIDUCIALUFIDUCIAL  [FIDUCIAL-MICRO]  61.98,59.94 0 bottom
FD40  FIDUCIALUFIDUCIAL  [FIDUCIAL-MICRO]  61.98,59.94 0 top
FD41  FIDUCIALUFIDUCIAL  [FIDUCIAL-MICRO]  65.05,82.88 0 top
FD42  FIDUCIALUFIDUCIAL  [FIDUCIAL-MICRO]  65.05,82.88 0 bottom
FD43  FIDUCIALUFIDUCIAL  [FIDUCIAL-MICRO]  90.42,59.94 0 bottom
FD44  FIDUCIALUFIDUCIAL  [FIDUCIAL-MICRO]  90.42,59.94 0 top
FD45  FIDUCIALUFIDUCIAL  [FIDUCIAL-MICRO]  93.5,82.88 0 top
FD46  FIDUCIALUFIDUCIAL  [FIDUCIAL-MICRO]  93.5,82.88 0 bottom
FD47  FIDUCIALUFIDUCIAL  [FIDUCIAL-MICRO]  118.87,59.94 0 bottom
FD48  FIDUCIALUFIDUCIAL  [FIDUCIAL-MICRO]  118.87,59.94 0 top
FD49  FIDUCIALUFIDUCIAL  [FIDUCIAL-MICRO]  8.15,108.79 0 top
FD50  FIDUCIALUFIDUCIAL  [FIDUCIAL-MICRO]  8.15,108.79 0 bottom
FD51  FIDUCIALUFIDUCIAL  [FIDUCIAL-MICRO]  33.53,85.85 0 bottom
FD52  FIDUCIALUFIDUCIAL  [FIDUCIAL-MICRO]  33.53,85.85 0 top
FD53  FIDUCIALUFIDUCIAL  [FIDUCIAL-MICRO]  36.6,108.79 0 top
FD54  FIDUCIALUFIDUCIAL  [FIDUCIAL-MICRO]  36.6,108.79 0 bottom
FD55  FIDUCIALUFIDUCIAL  [FIDUCIAL-MICRO]  61.98,85.85 0 bottom
FD56  FIDUCIALUFIDUCIAL  [FIDUCIAL-MICRO]  61.98,85.85 0 top
FD57  FIDUCIALUFIDUCIAL  [FIDUCIAL-MICRO]  65.05,108.79 0 top
FD58  FIDUCIALUFIDUCIAL  [FIDUCIAL-MICRO]  65.05,108.79 0 bottom
FD59  FIDUCIALUFIDUCIAL  [FIDUCIAL-MICRO]  90.42,85.85 0 bottom
FD60  FIDUCIALUFIDUCIAL  [FIDUCIAL-MICRO]  90.42,85.85 0 top
FD61  FIDUCIALUFIDUCIAL  [FIDUCIAL-MICRO]  93.5,108.79 0 top
FD62  FIDUCIALUFIDUCIAL  [FIDUCIAL-MICRO]  93.5,108.79 0 bottom
FD63  FIDUCIALUFIDUCIAL  [FIDUCIAL-MICRO]  118.87,85.85 0 bottom
FD64  FIDUCIALUFIDUCIAL  [FIDUCIAL-MICRO]  118.87,85.85 0 top
FD65  FIDUCIALUFIDUCIAL  [FIDUCIAL-MICRO]  8.15,134.7 0 top
FD66  FIDUCIALUFIDUCIAL  [FIDUCIAL-MICRO]  8.15,134.7 0 bottom
FD67  FIDUCIALUFIDUCIAL  [FIDUCIAL-MICRO]  33.53,111.76 0 bottom
FD68  FIDUCIALUFIDUCIAL  [FIDUCIAL-MICRO]  33.53,111.76 0 top
FD69  FIDUCIALUFIDUCIAL  [FIDUCIAL-MICRO]  36.6,134.7 0 top
FD70  FIDUCIALUFIDUCIAL  [FIDUCIAL-MICRO]  36.6,134.7 0 bottom
FD71  FIDUCIALUFIDUCIAL  [FIDUCIAL-MICRO]  61.98,111.76 0 bottom
FD72  FIDUCIALUFIDUCIAL  [FIDUCIAL-MICRO]  61.98,111.76 0 top
FD73  FIDUCIALUFIDUCIAL  [FIDUCIAL-MICRO]  65.05,134.7 0 top
FD74  FIDUCIALUFIDUCIAL  [FIDUCIAL-MICRO]  65.05,134.7 0 bottom
FD75  FIDUCIALUFIDUCIAL  [FIDUCIAL-MICRO]  90.42,111.76 0 bottom
FD76  FIDUCIALUFIDUCIAL  [FIDUCIAL-MICRO]  90.42,111.76 0 top
FD77  FIDUCIALUFIDUCIAL  [FIDUCIAL-MICRO]  93.5,134.7 0 top
FD78  FIDUCIALUFIDUCIAL  [FIDUCIAL-MICRO]  93.5,134.7 0 bottom
FD79  FIDUCIALUFIDUCIAL  [FIDUCIAL-MICRO]  118.87,111.76 0 bottom
FD80  FIDUCIALUFIDUCIAL  [FIDUCIAL-MICRO]  118.87,111.76 0 top
FD81  FIDUCIALUFIDUCIAL  [FIDUCIAL-MICRO]  8.15,160.6 0 top
FD82  FIDUCIALUFIDUCIAL  [FIDUCIAL-MICRO]  8.15,160.6 0 bottom
FD83  FIDUCIALUFIDUCIAL  [FIDUCIAL-MICRO]  33.53,137.67 0 bottom
FD84  FIDUCIALUFIDUCIAL  [FIDUCIAL-MICRO]  33.53,137.67 0 top
FD85  FIDUCIALUFIDUCIAL  [FIDUCIAL-MICRO]  36.6,160.6 0 top
FD86  FIDUCIALUFIDUCIAL  [FIDUCIAL-MICRO]  36.6,160.6 0 bottom
FD87  FIDUCIALUFIDUCIAL  [FIDUCIAL-MICRO]  61.98,137.67 0 bottom
FD88  FIDUCIALUFIDUCIAL  [FIDUCIAL-MICRO]  61.98,137.67 0 top
FD89  FIDUCIALUFIDUCIAL  [FIDUCIAL-MICRO]  65.05,160.6 0 top
FD90  FIDUCIALUFIDUCIAL  [FIDUCIAL-MICRO]  65.05,160.6 0 bottom
FD91  FIDUCIALUFIDUCIAL  [FIDUCIAL-MICRO]  90.42,137.67 0 bottom
FD92  FIDUCIALUFIDUCIAL  [FIDUCIAL-MICRO]  90.42,137.67 0 top
FD93  FIDUCIALUFIDUCIAL  [FIDUCIAL-MICRO]  93.5,160.6 0 top
FD94  FIDUCIALUFIDUCIAL  [FIDUCIAL-MICRO]  93.5,160.6 0 bottom
FD95  FIDUCIALUFIDUCIAL  [FIDUCIAL-MICRO]  118.87,137.67 0 bottom
FD96  FIDUCIALUFIDUCIAL  [FIDUCIAL-MICRO]  118.87,137.67 0 top
FD97  FIDUCIALUFIDUCIAL  [FIDUCIAL-MICRO]  8.15,186.51 0 top
FD98  FIDUCIALUFIDUCIAL  [FIDUCIAL-MICRO]  8.15,186.51 0 bottom
FD99  FIDUCIALUFIDUCIAL  [FIDUCIAL-MICRO]  33.53,163.58 0 bottom
FD100  FIDUCIALUFIDUCIAL  [FIDUCIAL-MICRO]  33.53,163.58 0 top
FD101  FIDUCIALUFIDUCIAL  [FIDUCIAL-MICRO]  36.6,186.51 0 top
FD102  FIDUCIALUFIDUCIAL  [FIDUCIAL-MICRO]  36.6,186.51 0 bottom
FD103  FIDUCIALUFIDUCIAL  [FIDUCIAL-MICRO]  61.98,163.58 0 bottom
FD104  FIDUCIALUFIDUCIAL  [FIDUCIAL-MICRO]  61.98,163.58 0 top
FD105  FIDUCIALUFIDUCIAL  [FIDUCIAL-MICRO]  65.05,186.51 0 top
FD106  FIDUCIALUFIDUCIAL  [FIDUCIAL-MICRO]  65.05,186.51 0 bottom
FD107  FIDUCIALUFIDUCIAL  [FIDUCIAL-MICRO]  90.42,163.58 0 bottom
FD108  FIDUCIALUFIDUCIAL  [FIDUCIAL-MICRO]  90.42,163.58 0 top
FD109  FIDUCIALUFIDUCIAL  [FIDUCIAL-MICRO]  93.5,186.51 0 top
FD110  FIDUCIALUFIDUCIAL  [FIDUCIAL-MICRO]  93.5,186.51 0 bottom
FD111  FIDUCIALUFIDUCIAL  [FIDUCIAL-MICRO]  118.87,163.58 0 bottom
FD112  FIDUCIALUFIDUCIAL  [FIDUCIAL-MICRO]  118.87,163.58 0 top
H1  STAND-OFFTIGHT  [STAND-OFF-TIGHT]  30.99,29.72 0 top
H2  STAND-OFFTIGHT  [STAND-OFF-TIGHT]  10.67,29.72 0 top
H3  STAND-OFFTIGHT  [STAND-OFF-TIGHT]  59.44,29.72 0 top
H4  STAND-OFFTIGHT  [STAND-OFF-TIGHT]  39.12,29.72 0 top
H5  STAND-OFFTIGHT  [STAND-OFF-TIGHT]  87.88,29.72 0 top
H6  STAND-OFFTIGHT  [STAND-OFF-TIGHT]  67.56,29.72 0 top
H7  STAND-OFFTIGHT  [STAND-OFF-TIGHT]  116.33,29.72 0 top
H8  STAND-OFFTIGHT  [STAND-OFF-TIGHT]  96.01,29.72 0 top
H9  STAND-OFFTIGHT  [STAND-OFF-TIGHT]  30.99,55.63 0 top
H10  STAND-OFFTIGHT  [STAND-OFF-TIGHT]  10.67,55.63 0 top
H11  STAND-OFFTIGHT  [STAND-OFF-TIGHT]  59.44,55.63 0 top
H12  STAND-OFFTIGHT  [STAND-OFF-TIGHT]  39.12,55.63 0 top
H13  STAND-OFFTIGHT  [STAND-OFF-TIGHT]  87.88,55.63 0 top
H14  STAND-OFFTIGHT  [STAND-OFF-TIGHT]  67.56,55.63 0 top
H15  STAND-OFFTIGHT  [STAND-OFF-TIGHT]  116.33,55.63 0 top
H16  STAND-OFFTIGHT  [STAND-OFF-TIGHT]  96.01,55.63 0 top
H17  STAND-OFFTIGHT  [STAND-OFF-TIGHT]  30.99,81.53 0 top
H18  STAND-OFFTIGHT  [STAND-OFF-TIGHT]  10.67,81.53 0 top
H19  STAND-OFFTIGHT  [STAND-OFF-TIGHT]  59.44,81.53 0 top
H20  STAND-OFFTIGHT  [STAND-OFF-TIGHT]  39.12,81.53 0 top
H21  STAND-OFFTIGHT  [STAND-OFF-TIGHT]  87.88,81.53 0 top
H22  STAND-OFFTIGHT  [STAND-OFF-TIGHT]  67.56,81.53 0 top
H23  STAND-OFFTIGHT  [STAND-OFF-TIGHT]  116.33,81.53 0 top
H24  STAND-OFFTIGHT  [STAND-OFF-TIGHT]  96.01,81.53 0 top
H25  STAND-OFFTIGHT  [STAND-OFF-TIGHT]  30.99,107.44 0 top
H26  STAND-OFFTIGHT  [STAND-OFF-TIGHT]  10.67,107.44 0 top
H27  STAND-OFFTIGHT  [STAND-OFF-TIGHT]  59.44,107.44 0 top
H28  STAND-OFFTIGHT  [STAND-OFF-TIGHT]  39.12,107.44 0 top
H29  STAND-OFFTIGHT  [STAND-OFF-TIGHT]  87.88,107.44 0 top
H30  STAND-OFFTIGHT  [STAND-OFF-TIGHT]  67.56,107.44 0 top
H31  STAND-OFFTIGHT  [STAND-OFF-TIGHT]  116.33,107.44 0 top
H32  STAND-OFFTIGHT  [STAND-OFF-TIGHT]  96.01,107.44 0 top
H33  STAND-OFFTIGHT  [STAND-OFF-TIGHT]  30.99,133.35 0 top
H34  STAND-OFFTIGHT  [STAND-OFF-TIGHT]  10.67,133.35 0 top
H35  STAND-OFFTIGHT  [STAND-OFF-TIGHT]  59.44,133.35 0 top
H36  STAND-OFFTIGHT  [STAND-OFF-TIGHT]  39.12,133.35 0 top
H37  STAND-OFFTIGHT  [STAND-OFF-TIGHT]  87.88,133.35 0 top
H38  STAND-OFFTIGHT  [STAND-OFF-TIGHT]  67.56,133.35 0 top
H39  STAND-OFFTIGHT  [STAND-OFF-TIGHT]  116.33,133.35 0 top
H40  STAND-OFFTIGHT  [STAND-OFF-TIGHT]  96.01,133.35 0 top
H41  STAND-OFFTIGHT  [STAND-OFF-TIGHT]  30.99,159.26 0 top
H42  STAND-OFFTIGHT  [STAND-OFF-TIGHT]  10.67,159.26 0 top
H43  STAND-OFFTIGHT  [STAND-OFF-TIGHT]  59.44,159.26 0 top
H44  STAND-OFFTIGHT  [STAND-OFF-TIGHT]  39.12,159.26 0 top
H45  STAND-OFFTIGHT  [STAND-OFF-TIGHT]  87.88,159.26 0 top
H46  STAND-OFFTIGHT  [STAND-OFF-TIGHT]  67.56,159.26 0 top
H47  STAND-OFFTIGHT  [STAND-OFF-TIGHT]  116.33,159.26 0 top
H48  STAND-OFFTIGHT  [STAND-OFF-TIGHT]  96.01,159.26 0 top
H49  STAND-OFFTIGHT  [STAND-OFF-TIGHT]  30.99,185.17 0 top
H50  STAND-OFFTIGHT  [STAND-OFF-TIGHT]  10.67,185.17 0 top
H51  STAND-OFFTIGHT  [STAND-OFF-TIGHT]  59.44,185.17 0 top
H52  STAND-OFFTIGHT  [STAND-OFF-TIGHT]  39.12,185.17 0 top
H53  STAND-OFFTIGHT  [STAND-OFF-TIGHT]  87.88,185.17 0 top
H54  STAND-OFFTIGHT  [STAND-OFF-TIGHT]  67.56,185.17 0 top
H55  STAND-OFFTIGHT  [STAND-OFF-TIGHT]  116.33,185.17 0 top
H56  STAND-OFFTIGHT  [STAND-OFF-TIGHT]  96.01,185.17 0 top
J1  QWIIC_RIGHT_ANGLE  [JST04_1MM_RA]  11.94,19.56 90 bottom
J2  QWIIC_RIGHT_ANGLE  [JST04_1MM_RA]  29.72,19.56 270 bottom
J3  [1X08_NO_SILK]  11.94,10.67 0 top
J4  [1X05_NO_SILK]  14.48,30.99 0 top
J5  [1X08_NO_SILK]  11.94,8.13 0 top
J6  QWIIC_RIGHT_ANGLE  [JST04_1MM_RA]  40.39,19.56 90 bottom
J7  [1X01_SMALL]  27.18,27.18 0 top
J8  [1X01_SMALL]  27.18,24.64 0 top
J9  QWIIC_RIGHT_ANGLE  [JST04_1MM_RA]  58.17,19.56 270 bottom
J10  [1X05_NO_SILK]  42.93,30.99 0 top
J11  [1X01_SMALL]  55.63,27.18 0 top
J12  [1X01_SMALL]  55.63,24.64 0 top
J13  [1X08_NO_SILK]  40.39,10.67 0 top
J14  [1X08_NO_SILK]  40.39,8.13 0 top
J15  QWIIC_RIGHT_ANGLE  [JST04_1MM_RA]  68.83,19.56 90 bottom
J16  QWIIC_RIGHT_ANGLE  [JST04_1MM_RA]  86.61,19.56 270 bottom
J17  [1X05_NO_SILK]  71.37,30.99 0 top
J18  [1X01_SMALL]  84.07,27.18 0 top
J19  [1X01_SMALL]  84.07,24.64 0 top
J20  [1X08_NO_SILK]  68.83,10.67 0 top
J21  [1X08_NO_SILK]  68.83,8.13 0 top
J22  QWIIC_RIGHT_ANGLE  [JST04_1MM_RA]  97.28,19.56 90 bottom
J23  QWIIC_RIGHT_ANGLE  [JST04_1MM_RA]  115.06,19.56 270 bottom
J24  [1X05_NO_SILK]  99.82,30.99 0 top
J25  [1X01_SMALL]  112.52,27.18 0 top
J26  [1X01_SMALL]  112.52,24.64 0 top
J27  [1X08_NO_SILK]  97.28,10.67 0 top
J28  [1X08_NO_SILK]  97.28,8.13 0 top
J29  QWIIC_RIGHT_ANGLE  [JST04_1MM_RA]  11.94,45.47 90 bottom
J30  QWIIC_RIGHT_ANGLE  [JST04_1MM_RA]  29.72,45.47 270 bottom
J31  [1X05_NO_SILK]  14.48,56.9 0 top
J32  [1X01_SMALL]  27.18,53.09 0 top
J33  [1X01_SMALL]  27.18,50.55 0 top
J34  [1X08_NO_SILK]  11.94,36.58 0 top
J35  [1X08_NO_SILK]  11.94,34.04 0 top
J36  QWIIC_RIGHT_ANGLE  [JST04_1MM_RA]  40.39,45.47 90 bottom
J37  QWIIC_RIGHT_ANGLE  [JST04_1MM_RA]  58.17,45.47 270 bottom
J38  [1X05_NO_SILK]  42.93,56.9 0 top
J39  [1X01_SMALL]  55.63,53.09 0 top
J40  [1X01_SMALL]  55.63,50.55 0 top
J41  [1X08_NO_SILK]  40.39,36.58 0 top
J42  [1X08_NO_SILK]  40.39,34.04 0 top
J43  QWIIC_RIGHT_ANGLE  [JST04_1MM_RA]  68.83,45.47 90 bottom
J44  QWIIC_RIGHT_ANGLE  [JST04_1MM_RA]  86.61,45.47 270 bottom
J45  [1X05_NO_SILK]  71.37,56.9 0 top
J46  [1X01_SMALL]  84.07,53.09 0 top
J47  [1X01_SMALL]  84.07,50.55 0 top
J48  [1X08_NO_SILK]  68.83,36.58 0 top
J49  [1X08_NO_SILK]  68.83,34.04 0 top
J50  QWIIC_RIGHT_ANGLE  [JST04_1MM_RA]  97.28,45.47 90 bottom
J51  QWIIC_RIGHT_ANGLE  [JST04_1MM_RA]  115.06,45.47 270 bottom
J52  [1X05_NO_SILK]  99.82,56.9 0 top
J53  [1X01_SMALL]  112.52,53.09 0 top
J54  [1X01_SMALL]  112.52,50.55 0 top
J55  [1X08_NO_SILK]  97.28,36.58 0 top
J56  [1X08_NO_SILK]  97.28,34.04 0 top
J57  QWIIC_RIGHT_ANGLE  [JST04_1MM_RA]  11.94,71.37 90 bottom
J58  QWIIC_RIGHT_ANGLE  [JST04_1MM_RA]  29.72,71.37 270 bottom
J59  [1X05_NO_SILK]  14.48,82.8 0 top
J60  [1X01_SMALL]  27.18,78.99 0 top
J61  [1X01_SMALL]  27.18,76.45 0 top
J62  [1X08_NO_SILK]  11.94,62.48 0 top
J63  [1X08_NO_SILK]  11.94,59.94 0 top
J64  QWIIC_RIGHT_ANGLE  [JST04_1MM_RA]  40.39,71.37 90 bottom
J65  QWIIC_RIGHT_ANGLE  [JST04_1MM_RA]  58.17,71.37 270 bottom
J66  [1X05_NO_SILK]  42.93,82.8 0 top
J67  [1X01_SMALL]  55.63,78.99 0 top
J68  [1X01_SMALL]  55.63,76.45 0 top
J69  [1X08_NO_SILK]  40.39,62.48 0 top
J70  [1X08_NO_SILK]  40.39,59.94 0 top
J71  QWIIC_RIGHT_ANGLE  [JST04_1MM_RA]  68.83,71.37 90 bottom
J72  QWIIC_RIGHT_ANGLE  [JST04_1MM_RA]  86.61,71.37 270 bottom
J73  [1X05_NO_SILK]  71.37,82.8 0 top
J74  [1X01_SMALL]  84.07,78.99 0 top
J75  [1X01_SMALL]  84.07,76.45 0 top
J76  [1X08_NO_SILK]  68.83,62.48 0 top
J77  [1X08_NO_SILK]  68.83,59.94 0 top
J78  QWIIC_RIGHT_ANGLE  [JST04_1MM_RA]  97.28,71.37 90 bottom
J79  QWIIC_RIGHT_ANGLE  [JST04_1MM_RA]  115.06,71.37 270 bottom
J80  [1X05_NO_SILK]  99.82,82.8 0 top
J81  [1X01_SMALL]  112.52,78.99 0 top
J82  [1X01_SMALL]  112.52,76.45 0 top
J83  [1X08_NO_SILK]  97.28,62.48 0 top
J84  [1X08_NO_SILK]  97.28,59.94 0 top
J85  QWIIC_RIGHT_ANGLE  [JST04_1MM_RA]  11.94,97.28 90 bottom
J86  QWIIC_RIGHT_ANGLE  [JST04_1MM_RA]  29.72,97.28 270 bottom
J87  [1X05_NO_SILK]  14.48,108.71 0 top
J88  [1X01_SMALL]  27.18,104.9 0 top
J89  [1X01_SMALL]  27.18,102.36 0 top
J90  [1X08_NO_SILK]  11.94,88.39 0 top
J91  [1X08_NO_SILK]  11.94,85.85 0 top
J92  QWIIC_RIGHT_ANGLE  [JST04_1MM_RA]  40.39,97.28 90 bottom
J93  QWIIC_RIGHT_ANGLE  [JST04_1MM_RA]  58.17,97.28 270 bottom
J94  [1X05_NO_SILK]  42.93,108.71 0 top
J95  [1X01_SMALL]  55.63,104.9 0 top
J96  [1X01_SMALL]  55.63,102.36 0 top
J97  [1X08_NO_SILK]  40.39,88.39 0 top
J98  [1X08_NO_SILK]  40.39,85.85 0 top
J99  QWIIC_RIGHT_ANGLE  [JST04_1MM_RA]  68.83,97.28 90 bottom
J100  QWIIC_RIGHT_ANGLE  [JST04_1MM_RA]  86.61,97.28 270 bottom
J101  [1X05_NO_SILK]  71.37,108.71 0 top
J102  [1X01_SMALL]  84.07,104.9 0 top
J103  [1X01_SMALL]  84.07,102.36 0 top
J104  [1X08_NO_SILK]  68.83,88.39 0 top
J105  [1X08_NO_SILK]  68.83,85.85 0 top
J106  QWIIC_RIGHT_ANGLE  [JST04_1MM_RA]  97.28,97.28 90 bottom
J107  QWIIC_RIGHT_ANGLE  [JST04_1MM_RA]  115.06,97.28 270 bottom
J108  [1X05_NO_SILK]  99.82,108.71 0 top
J109  [1X01_SMALL]  112.52,104.9 0 top
J110  [1X01_SMALL]  112.52,102.36 0 top
J111  [1X08_NO_SILK]  97.28,88.39 0 top
J112  [1X08_NO_SILK]  97.28,85.85 0 top
J113  QWIIC_RIGHT_ANGLE  [JST04_1MM_RA]  11.94,123.19 90 bottom
J114  QWIIC_RIGHT_ANGLE  [JST04_1MM_RA]  29.72,123.19 270 bottom
J115  [1X05_NO_SILK]  14.48,134.62 0 top
J116  [1X01_SMALL]  27.18,130.81 0 top
J117  [1X01_SMALL]  27.18,128.27 0 top
J118  [1X08_NO_SILK]  11.94,114.3 0 top
J119  [1X08_NO_SILK]  11.94,111.76 0 top
J120  QWIIC_RIGHT_ANGLE  [JST04_1MM_RA]  40.39,123.19 90 bottom
J121  QWIIC_RIGHT_ANGLE  [JST04_1MM_RA]  58.17,123.19 270 bottom
J122  [1X05_NO_SILK]  42.93,134.62 0 top
J123  [1X01_SMALL]  55.63,130.81 0 top
J124  [1X01_SMALL]  55.63,128.27 0 top
J125  [1X08_NO_SILK]  40.39,114.3 0 top
J126  [1X08_NO_SILK]  40.39,111.76 0 top
J127  QWIIC_RIGHT_ANGLE  [JST04_1MM_RA]  68.83,123.19 90 bottom
J128  QWIIC_RIGHT_ANGLE  [JST04_1MM_RA]  86.61,123.19 270 bottom
J129  [1X05_NO_SILK]  71.37,134.62 0 top
J130  [1X01_SMALL]  84.07,130.81 0 top
J131  [1X01_SMALL]  84.07,128.27 0 top
J132  [1X08_NO_SILK]  68.83,114.3 0 top
J133  [1X08_NO_SILK]  68.83,111.76 0 top
J134  QWIIC_RIGHT_ANGLE  [JST04_1MM_RA]  97.28,123.19 90 bottom
J135  QWIIC_RIGHT_ANGLE  [JST04_1MM_RA]  115.06,123.19 270 bottom
J136  [1X05_NO_SILK]  99.82,134.62 0 top
J137  [1X01_SMALL]  112.52,130.81 0 top
J138  [1X01_SMALL]  112.52,128.27 0 top
J139  [1X08_NO_SILK]  97.28,114.3 0 top
J140  [1X08_NO_SILK]  97.28,111.76 0 top
J141  QWIIC_RIGHT_ANGLE  [JST04_1MM_RA]  11.94,149.1 90 bottom
J142  QWIIC_RIGHT_ANGLE  [JST04_1MM_RA]  29.72,149.1 270 bottom
J143  [1X05_NO_SILK]  14.48,160.53 0 top
J144  [1X01_SMALL]  27.18,156.72 0 top
J145  [1X01_SMALL]  27.18,154.18 0 top
J146  [1X08_NO_SILK]  11.94,140.21 0 top
J147  [1X08_NO_SILK]  11.94,137.67 0 top
J148  QWIIC_RIGHT_ANGLE  [JST04_1MM_RA]  40.39,149.1 90 bottom
J149  QWIIC_RIGHT_ANGLE  [JST04_1MM_RA]  58.17,149.1 270 bottom
J150  [1X05_NO_SILK]  42.93,160.53 0 top
J151  [1X01_SMALL]  55.63,156.72 0 top
J152  [1X01_SMALL]  55.63,154.18 0 top
J153  [1X08_NO_SILK]  40.39,140.21 0 top
J154  [1X08_NO_SILK]  40.39,137.67 0 top
J155  QWIIC_RIGHT_ANGLE  [JST04_1MM_RA]  68.83,149.1 90 bottom
J156  QWIIC_RIGHT_ANGLE  [JST04_1MM_RA]  86.61,149.1 270 bottom
J157  [1X05_NO_SILK]  71.37,160.53 0 top
J158  [1X01_SMALL]  84.07,156.72 0 top
J159  [1X01_SMALL]  84.07,154.18 0 top
J160  [1X08_NO_SILK]  68.83,140.21 0 top
J161  [1X08_NO_SILK]  68.83,137.67 0 top
J162  QWIIC_RIGHT_ANGLE  [JST04_1MM_RA]  97.28,149.1 90 bottom
J163  QWIIC_RIGHT_ANGLE  [JST04_1MM_RA]  115.06,149.1 270 bottom
J164  [1X05_NO_SILK]  99.82,160.53 0 top
J165  [1X01_SMALL]  112.52,156.72 0 top
J166  [1X01_SMALL]  112.52,154.18 0 top
J167  [1X08_NO_SILK]  97.28,140.21 0 top
J168  [1X08_NO_SILK]  97.28,137.67 0 top
J169  QWIIC_RIGHT_ANGLE  [JST04_1MM_RA]  11.94,175.01 90 bottom
J170  QWIIC_RIGHT_ANGLE  [JST04_1MM_RA]  29.72,175.01 270 bottom
J171  [1X05_NO_SILK]  14.48,186.44 0 top
J172  [1X01_SMALL]  27.18,182.63 0 top
J173  [1X01_SMALL]  27.18,180.09 0 top
J174  [1X08_NO_SILK]  11.94,166.12 0 top
J175  [1X08_NO_SILK]  11.94,163.58 0 top
J176  QWIIC_RIGHT_ANGLE  [JST04_1MM_RA]  40.39,175.01 90 bottom
J177  QWIIC_RIGHT_ANGLE  [JST04_1MM_RA]  58.17,175.01 270 bottom
J178  [1X05_NO_SILK]  42.93,186.44 0 top
J179  [1X01_SMALL]  55.63,182.63 0 top
J180  [1X01_SMALL]  55.63,180.09 0 top
J181  [1X08_NO_SILK]  40.39,166.12 0 top
J182  [1X08_NO_SILK]  40.39,163.58 0 top
J183  QWIIC_RIGHT_ANGLE  [JST04_1MM_RA]  68.83,175.01 90 bottom
J184  QWIIC_RIGHT_ANGLE  [JST04_1MM_RA]  86.61,175.01 270 bottom
J185  [1X05_NO_SILK]  71.37,186.44 0 top
J186  [1X01_SMALL]  84.07,182.63 0 top
J187  [1X01_SMALL]  84.07,180.09 0 top
J188  [1X08_NO_SILK]  68.83,166.12 0 top
J189  [1X08_NO_SILK]  68.83,163.58 0 top
J190  QWIIC_RIGHT_ANGLE  [JST04_1MM_RA]  97.28,175.01 90 bottom
J191  QWIIC_RIGHT_ANGLE  [JST04_1MM_RA]  115.06,175.01 270 bottom
J192  [1X05_NO_SILK]  99.82,186.44 0 top
J193  [1X01_SMALL]  112.52,182.63 0 top
J194  [1X01_SMALL]  112.52,180.09 0 top
J195  [1X08_NO_SILK]  97.28,166.12 0 top
J196  [1X08_NO_SILK]  97.28,163.58 0 top
JP1  JUMPER-SMT_3_2-NC_TRACE_SILK  [SMT-JUMPER_3_2-NC_TRACE_SILK]  12.29,24.82 0 top
JP2  JUMPER-SMT_2_NO_SILK  [SMT-JUMPER_2_NO_SILK]  28.98,24.54 0 top
JP3  JUMPER-SMT_3_2-NC_TRACE_SILK  [SMT-JUMPER_3_2-NC_TRACE_SILK]  40.74,24.82 0 top
JP4  JUMPER-SMT_2_NO_SILK  [SMT-JUMPER_2_NO_SILK]  57.43,24.54 0 top
JP5  JUMPER-SMT_3_2-NC_TRACE_SILK  [SMT-JUMPER_3_2-NC_TRACE_SILK]  69.19,24.82 0 top
JP6  JUMPER-SMT_2_NO_SILK  [SMT-JUMPER_2_NO_SILK]  85.88,24.54 0 top
JP7  JUMPER-SMT_3_2-NC_TRACE_SILK  [SMT-JUMPER_3_2-NC_TRACE_SILK]  97.64,24.82 0 top
JP8  JUMPER-SMT_2_NO_SILK  [SMT-JUMPER_2_NO_SILK]  114.33,24.54 0 top
JP9  JUMPER-SMT_3_2-NC_TRACE_SILK  [SMT-JUMPER_3_2-NC_TRACE_SILK]  12.29,50.72 0 top
JP10  JUMPER-SMT_2_NO_SILK  [SMT-JUMPER_2_NO_SILK]  28.98,50.44 0 top
JP11  JUMPER-SMT_3_2-NC_TRACE_SILK  [SMT-JUMPER_3_2-NC_TRACE_SILK]  40.74,50.72 0 top
JP12  JUMPER-SMT_2_NO_SILK  [SMT-JUMPER_2_NO_SILK]  57.43,50.44 0 top
JP13  JUMPER-SMT_3_2-NC_TRACE_SILK  [SMT-JUMPER_3_2-NC_TRACE_SILK]  69.19,50.72 0 top
JP14  JUMPER-SMT_2_NO_SILK  [SMT-JUMPER_2_NO_SILK]  85.88,50.44 0 top
JP15  JUMPER-SMT_3_2-NC_TRACE_SILK  [SMT-JUMPER_3_2-NC_TRACE_SILK]  97.64,50.72 0 top
JP16  JUMPER-SMT_2_NO_SILK  [SMT-JUMPER_2_NO_SILK]  114.33,50.44 0 top
JP17  JUMPER-SMT_3_2-NC_TRACE_SILK  [SMT-JUMPER_3_2-NC_TRACE_SILK]  12.29,76.63 0 top
JP18  JUMPER-SMT_2_NO_SILK  [SMT-JUMPER_2_NO_SILK]  28.98,76.35 0 top
JP19  JUMPER-SMT_3_2-NC_TRACE_SILK  [SMT-JUMPER_3_2-NC_TRACE_SILK]  40.74,76.63 0 top
JP20  JUMPER-SMT_2_NO_SILK  [SMT-JUMPER_2_NO_SILK]  57.43,76.35 0 top
JP21  JUMPER-SMT_3_2-NC_TRACE_SILK  [SMT-JUMPER_3_2-NC_TRACE_SILK]  69.19,76.63 0 top
JP22  JUMPER-SMT_2_NO_SILK  [SMT-JUMPER_2_NO_SILK]  85.88,76.35 0 top
JP23  JUMPER-SMT_3_2-NC_TRACE_SILK  [SMT-JUMPER_3_2-NC_TRACE_SILK]  97.64,76.63 0 top
JP24  JUMPER-SMT_2_NO_SILK  [SMT-JUMPER_2_NO_SILK]  114.33,76.35 0 top
JP25  JUMPER-SMT_3_2-NC_TRACE_SILK  [SMT-JUMPER_3_2-NC_TRACE_SILK]  12.29,102.54 0 top
JP26  JUMPER-SMT_2_NO_SILK  [SMT-JUMPER_2_NO_SILK]  28.98,102.26 0 top
JP27  JUMPER-SMT_3_2-NC_TRACE_SILK  [SMT-JUMPER_3_2-NC_TRACE_SILK]  40.74,102.54 0 top
JP28  JUMPER-SMT_2_NO_SILK  [SMT-JUMPER_2_NO_SILK]  57.43,102.26 0 top
JP29  JUMPER-SMT_3_2-NC_TRACE_SILK  [SMT-JUMPER_3_2-NC_TRACE_SILK]  69.19,102.54 0 top
JP30  JUMPER-SMT_2_NO_SILK  [SMT-JUMPER_2_NO_SILK]  85.88,102.26 0 top
JP31  JUMPER-SMT_3_2-NC_TRACE_SILK  [SMT-JUMPER_3_2-NC_TRACE_SILK]  97.64,102.54 0 top
JP32  JUMPER-SMT_2_NO_SILK  [SMT-JUMPER_2_NO_SILK]  114.33,102.26 0 top
JP33  JUMPER-SMT_3_2-NC_TRACE_SILK  [SMT-JUMPER_3_2-NC_TRACE_SILK]  12.29,128.45 0 top
JP34  JUMPER-SMT_2_NO_SILK  [SMT-JUMPER_2_NO_SILK]  28.98,128.17 0 top
JP35  JUMPER-SMT_3_2-NC_TRACE_SILK  [SMT-JUMPER_3_2-NC_TRACE_SILK]  40.74,128.45 0 top
JP36  JUMPER-SMT_2_NO_SILK  [SMT-JUMPER_2_NO_SILK]  57.43,128.17 0 top
JP37  JUMPER-SMT_3_2-NC_TRACE_SILK  [SMT-JUMPER_3_2-NC_TRACE_SILK]  69.19,128.45 0 top
JP38  JUMPER-SMT_2_NO_SILK  [SMT-JUMPER_2_NO_SILK]  85.88,128.17 0 top
JP39  JUMPER-SMT_3_2-NC_TRACE_SILK  [SMT-JUMPER_3_2-NC_TRACE_SILK]  97.64,128.45 0 top
JP40  JUMPER-SMT_2_NO_SILK  [SMT-JUMPER_2_NO_SILK]  114.33,128.17 0 top
JP41  JUMPER-SMT_3_2-NC_TRACE_SILK  [SMT-JUMPER_3_2-NC_TRACE_SILK]  12.29,154.36 0 top
JP42  JUMPER-SMT_2_NO_SILK  [SMT-JUMPER_2_NO_SILK]  28.98,154.08 0 top
JP43  JUMPER-SMT_3_2-NC_TRACE_SILK  [SMT-JUMPER_3_2-NC_TRACE_SILK]  40.74,154.36 0 top
JP44  JUMPER-SMT_2_NO_SILK  [SMT-JUMPER_2_NO_SILK]  57.43,154.08 0 top
JP45  JUMPER-SMT_3_2-NC_TRACE_SILK  [SMT-JUMPER_3_2-NC_TRACE_SILK]  69.19,154.36 0 top
JP46  JUMPER-SMT_2_NO_SILK  [SMT-JUMPER_2_NO_SILK]  85.88,154.08 0 top
JP47  JUMPER-SMT_3_2-NC_TRACE_SILK  [SMT-JUMPER_3_2-NC_TRACE_SILK]  97.64,154.36 0 top
JP48  JUMPER-SMT_2_NO_SILK  [SMT-JUMPER_2_NO_SILK]  114.33,154.08 0 top
JP49  JUMPER-SMT_3_2-NC_TRACE_SILK  [SMT-JUMPER_3_2-NC_TRACE_SILK]  12.29,180.26 0 top
JP50  JUMPER-SMT_2_NO_SILK  [SMT-JUMPER_2_NO_SILK]  28.98,179.98 0 top
JP51  JUMPER-SMT_3_2-NC_TRACE_SILK  [SMT-JUMPER_3_2-NC_TRACE_SILK]  40.74,180.26 0 top
JP52  JUMPER-SMT_2_NO_SILK  [SMT-JUMPER_2_NO_SILK]  57.43,179.98 0 top
JP53  JUMPER-SMT_3_2-NC_TRACE_SILK  [SMT-JUMPER_3_2-NC_TRACE_SILK]  69.19,180.26 0 top
JP54  JUMPER-SMT_2_NO_SILK  [SMT-JUMPER_2_NO_SILK]  85.88,179.98 0 top
JP55  JUMPER-SMT_3_2-NC_TRACE_SILK  [SMT-JUMPER_3_2-NC_TRACE_SILK]  97.64,180.26 0 top
JP56  JUMPER-SMT_2_NO_SILK  [SMT-JUMPER_2_NO_SILK]  114.33,179.98 0 top
LED  JUMPER-SMT_2_NC_TRACE_SILK  [SMT-JUMPER_2_NC_TRACE_SILK]  32.99,24.54 180 top
LED1  JUMPER-SMT_2_NC_TRACE_SILK  [SMT-JUMPER_2_NC_TRACE_SILK]  61.44,24.54 180 top
LED2  JUMPER-SMT_2_NC_TRACE_SILK  [SMT-JUMPER_2_NC_TRACE_SILK]  89.89,24.54 180 top
LED3  JUMPER-SMT_2_NC_TRACE_SILK  [SMT-JUMPER_2_NC_TRACE_SILK]  118.34,24.54 180 top
LED4  JUMPER-SMT_2_NC_TRACE_SILK  [SMT-JUMPER_2_NC_TRACE_SILK]  32.99,50.44 180 top
LED5  JUMPER-SMT_2_NC_TRACE_SILK  [SMT-JUMPER_2_NC_TRACE_SILK]  61.44,50.44 180 top
LED6  JUMPER-SMT_2_NC_TRACE_SILK  [SMT-JUMPER_2_NC_TRACE_SILK]  89.89,50.44 180 top
LED7  JUMPER-SMT_2_NC_TRACE_SILK  [SMT-JUMPER_2_NC_TRACE_SILK]  118.34,50.44 180 top
LED8  JUMPER-SMT_2_NC_TRACE_SILK  [SMT-JUMPER_2_NC_TRACE_SILK]  32.99,76.35 180 top
LED9  JUMPER-SMT_2_NC_TRACE_SILK  [SMT-JUMPER_2_NC_TRACE_SILK]  61.44,76.35 180 top
LED10  JUMPER-SMT_2_NC_TRACE_SILK  [SMT-JUMPER_2_NC_TRACE_SILK]  89.89,76.35 180 top
LED11  JUMPER-SMT_2_NC_TRACE_SILK  [SMT-JUMPER_2_NC_TRACE_SILK]  118.34,76.35 180 top
LED12  JUMPER-SMT_2_NC_TRACE_SILK  [SMT-JUMPER_2_NC_TRACE_SILK]  32.99,102.26 180 top
LED13  JUMPER-SMT_2_NC_TRACE_SILK  [SMT-JUMPER_2_NC_TRACE_SILK]  61.44,102.26 180 top
LED14  JUMPER-SMT_2_NC_TRACE_SILK  [SMT-JUMPER_2_NC_TRACE_SILK]  89.89,102.26 180 top
LED15  JUMPER-SMT_2_NC_TRACE_SILK  [SMT-JUMPER_2_NC_TRACE_SILK]  118.34,102.26 180 top
LED16  JUMPER-SMT_2_NC_TRACE_SILK  [SMT-JUMPER_2_NC_TRACE_SILK]  32.99,128.17 180 top
LED17  JUMPER-SMT_2_NC_TRACE_SILK  [SMT-JUMPER_2_NC_TRACE_SILK]  61.44,128.17 180 top
LED18  JUMPER-SMT_2_NC_TRACE_SILK  [SMT-JUMPER_2_NC_TRACE_SILK]  89.89,128.17 180 top
LED19  JUMPER-SMT_2_NC_TRACE_SILK  [SMT-JUMPER_2_NC_TRACE_SILK]  118.34,128.17 180 top
LED20  JUMPER-SMT_2_NC_TRACE_SILK  [SMT-JUMPER_2_NC_TRACE_SILK]  32.99,154.08 180 top
LED21  JUMPER-SMT_2_NC_TRACE_SILK  [SMT-JUMPER_2_NC_TRACE_SILK]  61.44,154.08 180 top
LED22  JUMPER-SMT_2_NC_TRACE_SILK  [SMT-JUMPER_2_NC_TRACE_SILK]  89.89,154.08 180 top
LED23  JUMPER-SMT_2_NC_TRACE_SILK  [SMT-JUMPER_2_NC_TRACE_SILK]  118.34,154.08 180 top
LED24  JUMPER-SMT_2_NC_TRACE_SILK  [SMT-JUMPER_2_NC_TRACE_SILK]  32.99,179.98 180 top
LED25  JUMPER-SMT_2_NC_TRACE_SILK  [SMT-JUMPER_2_NC_TRACE_SILK]  61.44,179.98 180 top
LED26  JUMPER-SMT_2_NC_TRACE_SILK  [SMT-JUMPER_2_NC_TRACE_SILK]  89.89,179.98 180 top
LED27  JUMPER-SMT_2_NC_TRACE_SILK  [SMT-JUMPER_2_NC_TRACE_SILK]  118.34,179.98 180 top
LOGO1  SFE_LOGO_NAME.1_INCH  [SFE_LOGO_NAME_.1]  20.83,17.3 0 top
LOGO2  OSHW-LOGOS  [OSHW-LOGO-S]  8.79,10.79 0 top
LOGO3  QWIIC_LOGO_4MM  [QWIIC_4MM]  32.44,15.11 0 bottom
LOGO4  SFE_LOGO_NAME.1_INCH  [SFE_LOGO_NAME_.1]  49.28,17.3 0 top
LOGO5  OSHW-LOGOS  [OSHW-LOGO-S]  37.24,10.79 0 top
LOGO6  QWIIC_LOGO_4MM  [QWIIC_4MM]  60.88,15.11 0 bottom
LOGO7  SFE_LOGO_NAME.1_INCH  [SFE_LOGO_NAME_.1]  77.72,17.3 0 top
LOGO8  OSHW-LOGOS  [OSHW-LOGO-S]  65.68,10.79 0 top
LOGO9  QWIIC_LOGO_4MM  [QWIIC_4MM]  89.33,15.11 0 bottom
LOGO10  SFE_LOGO_NAME.1_INCH  [SFE_LOGO_NAME_.1]  106.17,17.3 0 top
LOGO11  OSHW-LOGOS  [OSHW-LOGO-S]  94.13,10.79 0 top
LOGO12  QWIIC_LOGO_4MM  [QWIIC_4MM]  117.78,15.11 0 bottom
LOGO13  SFE_LOGO_NAME.1_INCH  [SFE_LOGO_NAME_.1]  20.83,43.21 0 top
LOGO14  OSHW-LOGOS  [OSHW-LOGO-S]  8.79,36.7 0 top
LOGO15  QWIIC_LOGO_4MM  [QWIIC_4MM]  32.44,41.02 0 bottom
LOGO16  SFE_LOGO_NAME.1_INCH  [SFE_LOGO_NAME_.1]  49.28,43.21 0 top
LOGO17  OSHW-LOGOS  [OSHW-LOGO-S]  37.24,36.7 0 top
LOGO18  QWIIC_LOGO_4MM  [QWIIC_4MM]  60.88,41.02 0 bottom
LOGO19  SFE_LOGO_NAME.1_INCH  [SFE_LOGO_NAME_.1]  77.72,43.21 0 top
LOGO20  OSHW-LOGOS  [OSHW-LOGO-S]  65.68,36.7 0 top
LOGO21  QWIIC_LOGO_4MM  [QWIIC_4MM]  89.33,41.02 0 bottom
LOGO22  SFE_LOGO_NAME.1_INCH  [SFE_LOGO_NAME_.1]  106.17,43.21 0 top
LOGO23  OSHW-LOGOS  [OSHW-LOGO-S]  94.13,36.7 0 top
LOGO24  QWIIC_LOGO_4MM  [QWIIC_4MM]  117.78,41.02 0 bottom
LOGO25  SFE_LOGO_NAME.1_INCH  [SFE_LOGO_NAME_.1]  20.83,69.11 0 top
LOGO26  OSHW-LOGOS  [OSHW-LOGO-S]  8.79,62.61 0 top
LOGO27  QWIIC_LOGO_4MM  [QWIIC_4MM]  32.44,66.93 0 bottom
LOGO28  SFE_LOGO_NAME.1_INCH  [SFE_LOGO_NAME_.1]  49.28,69.11 0 top
LOGO29  OSHW-LOGOS  [OSHW-LOGO-S]  37.24,62.61 0 top
LOGO30  QWIIC_LOGO_4MM  [QWIIC_4MM]  60.88,66.93 0 bottom
LOGO31  SFE_LOGO_NAME.1_INCH  [SFE_LOGO_NAME_.1]  77.72,69.11 0 top
LOGO32  OSHW-LOGOS  [OSHW-LOGO-S]  65.68,62.61 0 top
LOGO33  QWIIC_LOGO_4MM  [QWIIC_4MM]  89.33,66.93 0 bottom
LOGO34  SFE_LOGO_NAME.1_INCH  [SFE_LOGO_NAME_.1]  106.17,69.11 0 top
LOGO35  OSHW-LOGOS  [OSHW-LOGO-S]  94.13,62.61 0 top
LOGO36  QWIIC_LOGO_4MM  [QWIIC_4MM]  117.78,66.93 0 bottom
LOGO37  SFE_LOGO_NAME.1_INCH  [SFE_LOGO_NAME_.1]  20.83,95.02 0 top
LOGO38  OSHW-LOGOS  [OSHW-LOGO-S]  8.79,88.52 0 top
LOGO39  QWIIC_LOGO_4MM  [QWIIC_4MM]  32.44,92.84 0 bottom
LOGO40  SFE_LOGO_NAME.1_INCH  [SFE_LOGO_NAME_.1]  49.28,95.02 0 top
LOGO41  OSHW-LOGOS  [OSHW-LOGO-S]  37.24,88.52 0 top
LOGO42  QWIIC_LOGO_4MM  [QWIIC_4MM]  60.88,92.84 0 bottom
LOGO43  SFE_LOGO_NAME.1_INCH  [SFE_LOGO_NAME_.1]  77.72,95.02 0 top
LOGO44  OSHW-LOGOS  [OSHW-LOGO-S]  65.68,88.52 0 top
LOGO45  QWIIC_LOGO_4MM  [QWIIC_4MM]  89.33,92.84 0 bottom
LOGO46  SFE_LOGO_NAME.1_INCH  [SFE_LOGO_NAME_.1]  106.17,95.02 0 top
LOGO47  OSHW-LOGOS  [OSHW-LOGO-S]  94.13,88.52 0 top
LOGO48  QWIIC_LOGO_4MM  [QWIIC_4MM]  117.78,92.84 0 bottom
LOGO49  SFE_LOGO_NAME.1_INCH  [SFE_LOGO_NAME_.1]  20.83,120.93 0 top
LOGO50  OSHW-LOGOS  [OSHW-LOGO-S]  8.79,114.43 0 top
LOGO51  QWIIC_LOGO_4MM  [QWIIC_4MM]  32.44,118.75 0 bottom
LOGO52  SFE_LOGO_NAME.1_INCH  [SFE_LOGO_NAME_.1]  49.28,120.93 0 top
LOGO53  OSHW-LOGOS  [OSHW-LOGO-S]  37.24,114.43 0 top
LOGO54  QWIIC_LOGO_4MM  [QWIIC_4MM]  60.88,118.75 0 bottom
LOGO55  SFE_LOGO_NAME.1_INCH  [SFE_LOGO_NAME_.1]  77.72,120.93 0 top
LOGO56  OSHW-LOGOS  [OSHW-LOGO-S]  65.68,114.43 0 top
LOGO57  QWIIC_LOGO_4MM  [QWIIC_4MM]  89.33,118.75 0 bottom
LOGO58  SFE_LOGO_NAME.1_INCH  [SFE_LOGO_NAME_.1]  106.17,120.93 0 top
LOGO59  OSHW-LOGOS  [OSHW-LOGO-S]  94.13,114.43 0 top
LOGO60  QWIIC_LOGO_4MM  [QWIIC_4MM]  117.78,118.75 0 bottom
LOGO61  SFE_LOGO_NAME.1_INCH  [SFE_LOGO_NAME_.1]  20.83,146.84 0 top
LOGO62  OSHW-LOGOS  [OSHW-LOGO-S]  8.79,140.34 0 top
LOGO63  QWIIC_LOGO_4MM  [QWIIC_4MM]  32.44,144.65 0 bottom
LOGO64  SFE_LOGO_NAME.1_INCH  [SFE_LOGO_NAME_.1]  49.28,146.84 0 top
LOGO65  OSHW-LOGOS  [OSHW-LOGO-S]  37.24,140.34 0 top
LOGO66  QWIIC_LOGO_4MM  [QWIIC_4MM]  60.88,144.65 0 bottom
LOGO67  SFE_LOGO_NAME.1_INCH  [SFE_LOGO_NAME_.1]  77.72,146.84 0 top
LOGO68  OSHW-LOGOS  [OSHW-LOGO-S]  65.68,140.34 0 top
LOGO69  QWIIC_LOGO_4MM  [QWIIC_4MM]  89.33,144.65 0 bottom
LOGO70  SFE_LOGO_NAME.1_INCH  [SFE_LOGO_NAME_.1]  106.17,146.84 0 top
LOGO71  OSHW-LOGOS  [OSHW-LOGO-S]  94.13,140.34 0 top
LOGO72  QWIIC_LOGO_4MM  [QWIIC_4MM]  117.78,144.65 0 bottom
LOGO73  SFE_LOGO_NAME.1_INCH  [SFE_LOGO_NAME_.1]  20.83,172.75 0 top
LOGO74  OSHW-LOGOS  [OSHW-LOGO-S]  8.79,166.24 0 top
LOGO75  QWIIC_LOGO_4MM  [QWIIC_4MM]  32.44,170.56 0 bottom
LOGO76  SFE_LOGO_NAME.1_INCH  [SFE_LOGO_NAME_.1]  49.28,172.75 0 top
LOGO77  OSHW-LOGOS  [OSHW-LOGO-S]  37.24,166.24 0 top